# EAGLE board thtV1.1 (EAGLE 7.4.0)
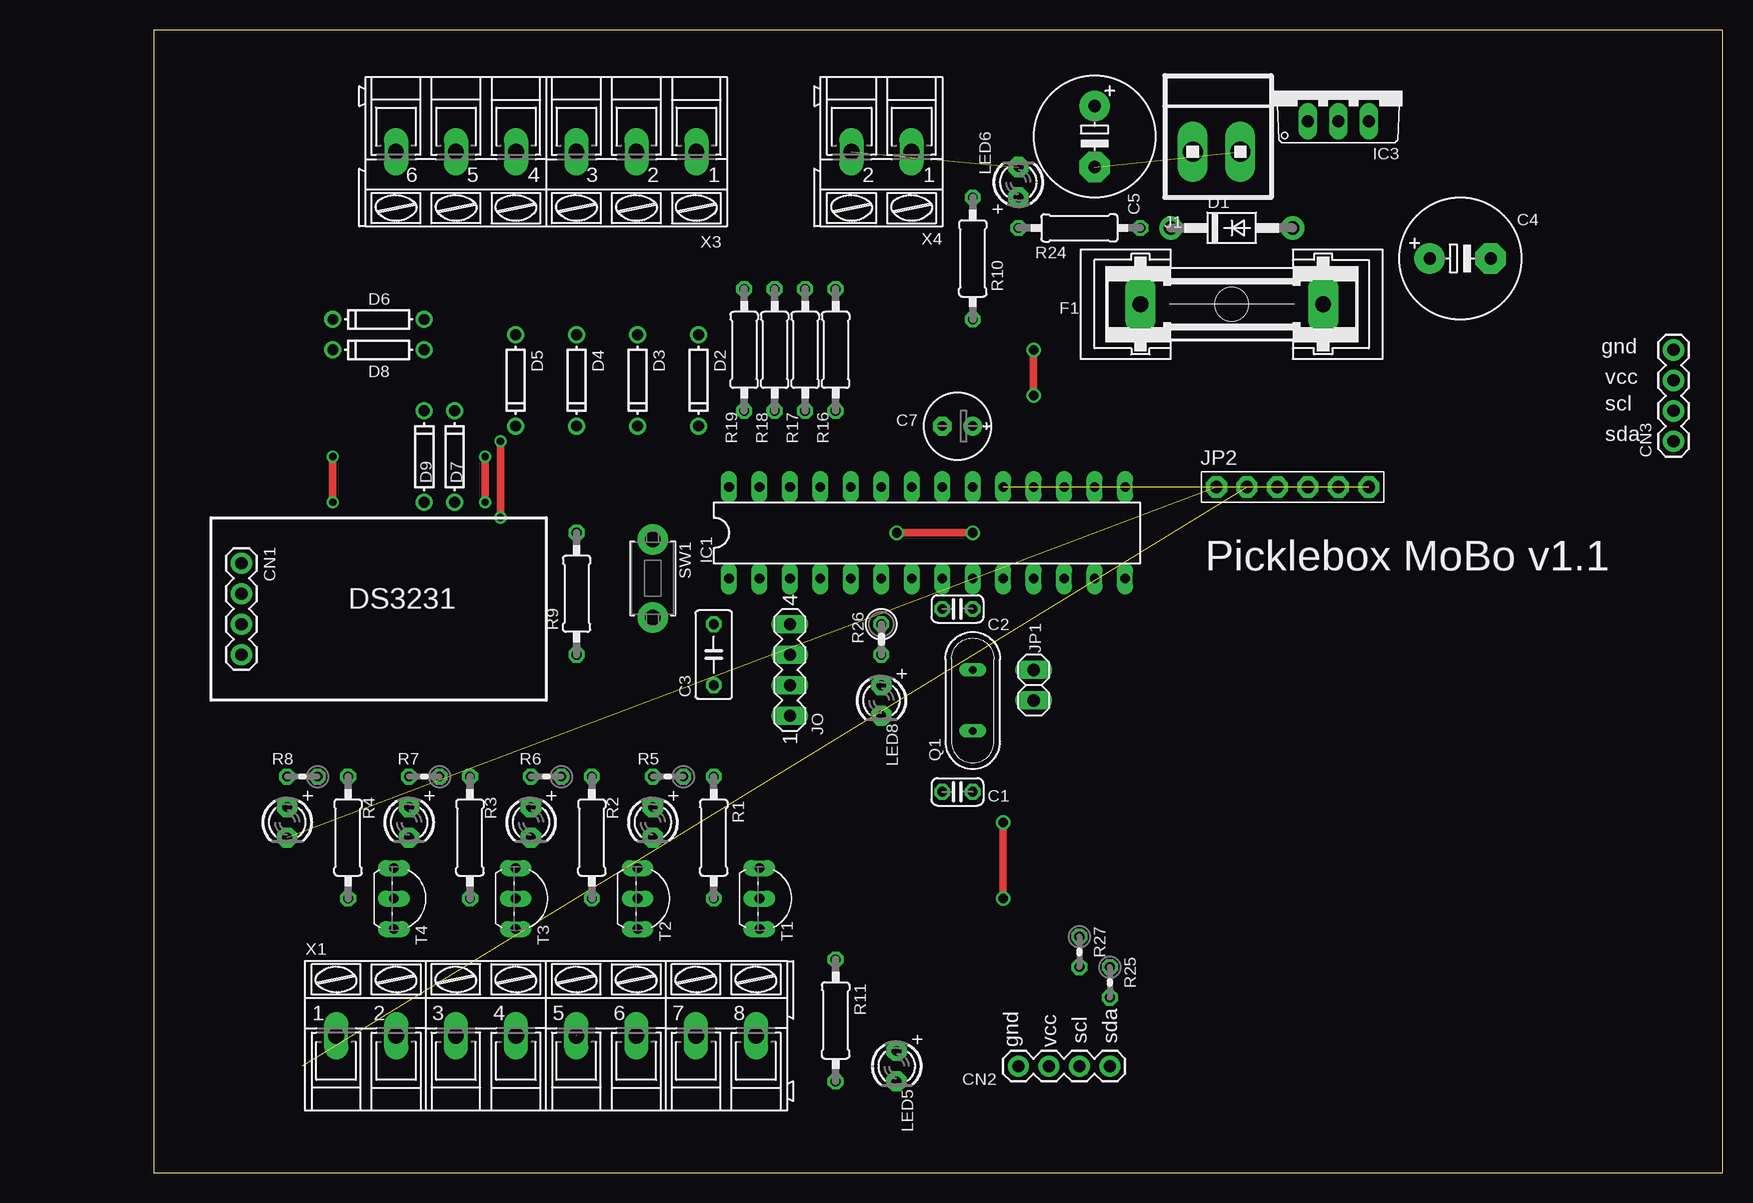
[diagram p0: board, top side]
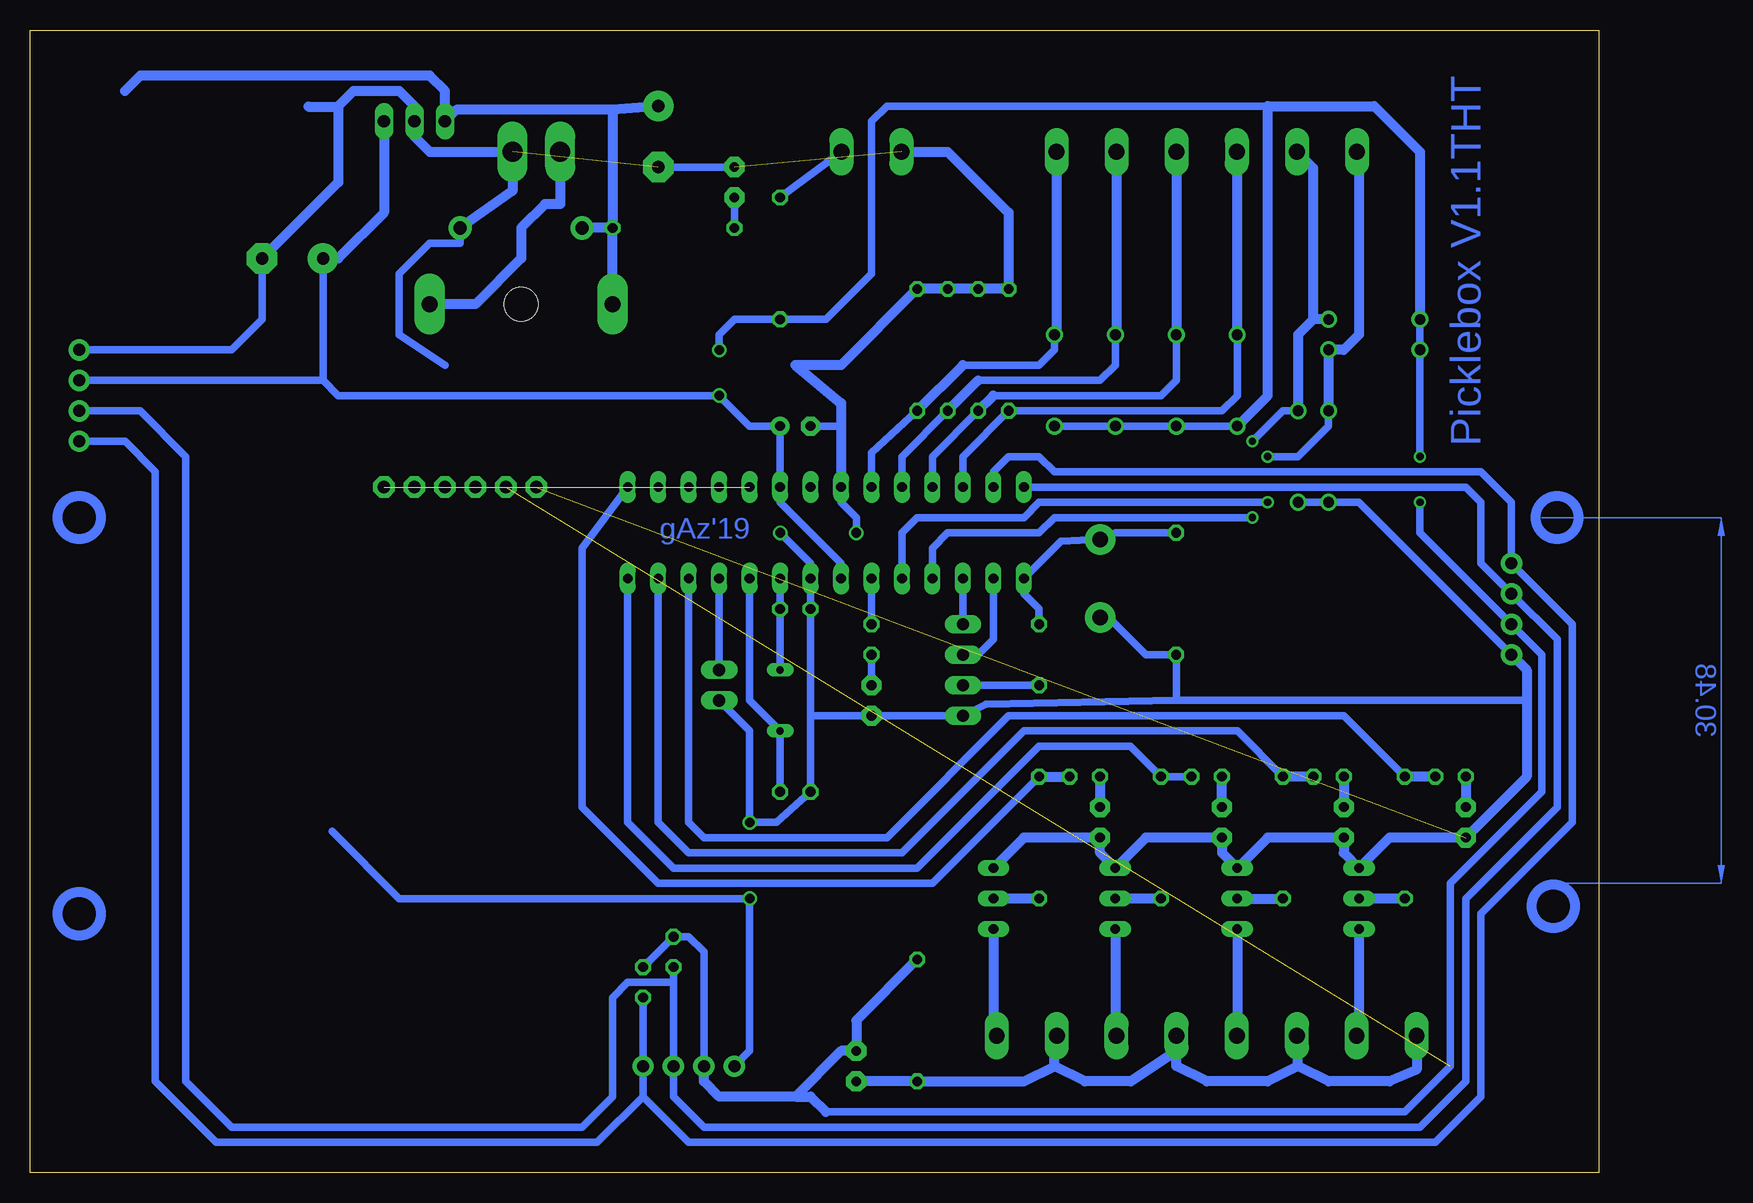
[diagram p1: board, bottom side, seen from below]

Size 130.79 x 95.24 mm. Coordinates in mm from the lower left corner, seen from the top.
Outline: 0,0 130.79,0 130.79,95.24 0,95.24 0,0
Copper layers (1*16): Top 0.035mm / dielectric 1.5mm / Bottom 0.035mm
Design rules "default": minimum track width 10mil, minimum drill 24mil, track to track 8mil, track to pad 8mil, pad to pad 8mil, via to via 8mil, smd to smd 8mil, copper to edge 40mil, drill to drill 8mil, minimum pad ring 10mil, minimum via ring 8mil, stop-mask expansion 4mil, vias tented up to drill 0mil, thermal gap 10mil

## Footprints (pad centres in the part's own frame; a part is rotated, then mirrored left to right if it is on the bottom)
C025-024X044 = drill 0.813 octagon: 1 -1.27,0; 2 1.27,0
C050-030X075 = drill 0.813 octagon: 1 -2.54,0; 2 2.54,0
E5-10,5 = drill 1.016 pad 2.54: + -2.54,0 | drill 1.016 pad 2.54 octagon: - 2.54,0
E2,5-6E = drill 0.813 pad 1.575: + -1.27,0 | drill 0.813 pad 1.575 octagon: - 1.27,0
1X04-BIG = drill 1.016 pad 1.778: 1 0,0; 2 2.54,0; 3 5.08,0; 4 7.62,0
DO41-10 = drill 1.118 pad 1.93: A 5.08,0; C -5.08,0
DO-1N4148 = drill 0.9: A -3.81,0; C 3.81,0
GSH15 = drill 1.321 pad 2.54 long: 1 -7.62,0; 2 7.62,0 | hole 2.794: 0,0
DIL28-3 = drill 0.813 long: 1 -16.51,-3.81; 2 -13.97,-3.81; 3 -11.43,-3.81; 4 -8.89,-3.81; 5 -6.35,-3.81; 6 -3.81,-3.81; 7 -1.27,-3.81; 8 1.27,-3.81; 9 3.81,-3.81; 10 6.35,-3.81; 11 8.89,-3.81; 12 11.43,-3.81; 13 13.97,-3.81; 14 16.51,-3.81; 15 16.51,3.81; 16 13.97,3.81; 17 11.43,3.81; 18 8.89,3.81; 19 6.35,3.81; 20 3.81,3.81; 21 1.27,3.81; 22 -1.27,3.81; 23 -3.81,3.81; 24 -6.35,3.81; 25 -8.89,3.81; 26 -11.43,3.81; 27 -13.97,3.81; 28 -16.51,3.81
TO220V = drill 1.016 long: 1 -2.54,-2.54; 2 0,-2.54; 3 2.54,-2.54
1X2MTA = drill 1.676 long: 1 1.981,0; 2 -1.981,0
MA04-1 = drill 1.016 long: 1 -3.81,0; 2 -1.27,0; 3 1.27,0; 4 3.81,0
1X02 = drill 1.016 long: 1 -1.27,0; 2 1.27,0
1X06-BIG = drill 1.016 pad 1.778 octagon: 1 -6.35,0; 2 -3.81,0; 3 -1.27,0; 4 1.27,0; 5 3.81,0; 6 6.35,0
LED3MM = drill 0.813 pad 1.676 octagon: A -1.27,0; K 1.27,0
QS = drill 0.61 long: 1 -2.54,0; 2 2.54,0
0207/10 = drill 0.813 octagon: 1 -5.08,0; 2 5.08,0
0204V = drill 0.813 octagon: 1 -1.27,0; 2 1.27,0
0207/2V = drill 0.813 octagon: 1 -1.27,0; 2 1.27,0
TACT_PANA-EVQ = drill 1.3 pad 2.54: P$1 -3.25,0; P$2 3.25,0
TO92-EBC-OVAL = drill 0.813 long: B 0,-1.27; C 2.54,-1.27; E -2.54,-1.27
AK300/8 = drill 1.321 long: 1 -17.501,0; 2 -12.497,0; 3 -7.518,0; 4 -2.515,0; 5 2.515,0; 6 7.518,0; 7 12.497,0; 8 17.501,0
AK300/6 = drill 1.321 long: 1 -12.522,0; 2 -7.518,0; 3 -2.515,0; 4 2.515,0; 5 7.518,0; 6 12.522,0
AK300/2 = drill 1.321 long: 1 -2.515,0; 2 2.489,0

## Placement (x,y rotation side)
C1  18p  [C025-024X044]  66.99,31.75 180 top
C2  18p  [C025-024X044]  66.99,46.99 180 top
C3  0u1  [C050-030X075]  46.67,43.18 90 top
C4  4.7u  [E5-10,5]  108.9,76.2 0 top
C5  100u  [E5-10,5]  78.42,86.36 270 top
C7  47u  [E2,5-6E]  66.99,62.23 180 top
CN1  Ds3231(i2c)  [1X04-BIG]  7.3,50.8 270 top
CN2  I2C-GPO  [1X04-BIG]  79.69,8.89 180 top
CN3  I2C-APU  [1X04-BIG]  126.68,60.96 90 top
D1  1N4004  [DO41-10]  89.85,78.74 0 top
D2  [DO-1N4148]  45.4,66.04 270 top
D3  [DO-1N4148]  40.32,66.04 270 top
D4  [DO-1N4148]  35.24,66.04 270 top
D5  [DO-1N4148]  30.16,66.04 270 top
D6  [DO-1N4148]  18.73,71.12 180 top
D7  [DO-1N4148]  25.08,59.69 90 top
D8  [DO-1N4148]  18.73,68.58 180 top
D9  [DO-1N4148]  22.54,59.69 90 top
F1  F1A  [GSH15]  89.85,72.39 180 top
IC1  ATMEGA328  [DIL28-3]  64.45,53.34 0 top
IC3  7805TV  [TO220V]  98.74,90.17 0 top
J1  PowerIn  [1X2MTA]  88.58,85.09 0 top
JO  Serial(+rst)  [MA04-1]  53.02,41.91 90 top
JP1  Main Pushbutton  [1X02]  73.34,40.64 270 top
JP2  SD_module  [1X06-BIG]  94.93,57.15 0 top
LED1  Out1  [LED3MM]  41.59,29.21 270 top
LED2  Out2  [LED3MM]  31.43,29.21 270 top
LED3  Out3  [LED3MM]  21.27,29.21 270 top
LED4  Out4  [LED3MM]  11.11,29.21 270 top
LED5  GPO-clip  [LED3MM]  61.91,8.89 270 top
LED6  pwr_ok  [LED3MM]  72.07,82.55 90 top
LED8  Err  [LED3MM]  60.64,39.37 270 top
Q1  16M  [QS]  68.26,39.37 90 top
R1  1k  [0207/10]  46.67,27.94 270 top
R2  1k  [0207/10]  36.51,27.94 270 top
R3  1k  [0207/10]  26.35,27.94 270 top
R4  1k  [0207/10]  16.19,27.94 270 top
R5  470  [0204V]  42.86,33.02 180 top
R6  470  [0204V]  32.7,33.02 180 top
R7  470  [0204V]  22.54,33.02 180 top
R8  470  [0204V]  12.38,33.02 180 top
R9  100k  [0207/10]  35.24,48.26 90 top
R10  0R1  [0207/10]  68.26,76.2 270 top
R11  4R7  [0207/10]  56.83,12.7 270 top
R16  1M  [0207/10]  56.83,68.58 90 top
R17  1M  [0207/10]  54.29,68.58 90 top
R18  1M  [0207/10]  51.75,68.58 90 top
R19  1M  [0207/10]  49.21,68.58 90 top
R24  470  [0207/10]  77.15,78.74 180 top
R25  10k  [0204V]  79.69,15.88 270 top
R26  330  [0207/2V]  60.64,44.45 270 top
R27  10k  [0204V]  77.15,18.41 270 top
SW1  Rst  [TACT_PANA-EVQ]  41.59,49.53 270 top
T1  2N2222  [TO92-EBC-OVAL]  51.75,22.86 270 top
T2  2N2222  [TO92-EBC-OVAL]  41.59,22.86 270 top
T3  2N2222  [TO92-EBC-OVAL]  31.43,22.86 270 top
T4  2N2222  [TO92-EBC-OVAL]  21.27,22.86 270 top
X1  GPO  [AK300/8]  32.7,11.43 0 top
X3  GPI  [AK300/6]  32.7,85.09 180 top
X4  Analog_Pwr  [AK300/2]  60.64,85.09 180 top

## Library data of the parts
C1-C3 = resistor
C4 C5 C7 R1-R11 R16-R19 R24-R27 = rcl
CN1-CN3 D1-D9 IC1 JP2 LED1-LED6 LED8 SW1 T1-T4 = adafruit
F1 = fuse; MPN: 64900001039; OC_FARNELL: 1271673; OC_NEWARK: 02P0318
IC3 = linear
J1 = con-amp
JO = con-lstb; OC_FARNELL: unknown; OC_NEWARK: unknown
JP1 = pinhead
Q1 = special
X1 X3 X4 = con-ptr500; OC_FARNELL: unknown; OC_NEWARK: unknown

## Nets
+5V: C4.+ C7.+ CN1.3 CN2.3 CN3.3 D2.C D3.C D4.C D5.C D6.C D8.C IC1.7 IC1.20 IC3.3 JP2.2 LED5.A R10.2 R11.1 R25.1 R27.1
GND: C1.2 C2.2 C4.- C5.- C7.- CN1.4 CN2.4 CN3.4 D1.A D7.A D9.A IC1.8 IC1.22 IC3.2 J1.1 JO.1 JP1.2 JP2.1 LED1.K LED2.K LED3.K LED4.K LED6.K LED8.K R9.1 R16.2 R17.2 R18.2 R19.2 SW1.P$2 T1.E T2.E T3.E T4.E X4.2
I2C_SCL: CN1.2 CN2.2 CN3.2 IC1.28 R27.2
I2C_SDA: CN1.1 CN2.1 CN3.1 IC1.27 R25.2
N$1: C2.1 IC1.9 Q1.2
N$2: C1.1 IC1.10 Q1.1
N$3: R4.2 T4.B
N$4: R3.2 T3.B
N$5: LED8.A R26.2
N$6: LED3.A R7.2
N$7: LED2.A R6.2
N$8: LED1.A R5.2
N$9: LED4.A R8.2
N$10: R1.2 T1.B
N$11: R2.2 T2.B
N$12: IC1.12 R4.1 R8.1
N$13: R10.1 X4.1
N$14: IC1.13 R3.1 R7.1
N$15: IC1.14 R2.1 R6.1
N$16: D3.A IC1.24 R17.1 X3.2
N$17: IC1.11 JP1.1
N$18: T3.C X1.4
N$19: D6.A D7.C IC1.4 X3.5
N$20: IC1.6 R26.1
N$21: C3.1 JO.2
N$22: IC1.18 JP2.3
N$23: IC1.19 JP2.5
N$24: IC1.2 JO.3
N$25: IC1.3 JO.4
N$26: IC1.17 JP2.4
N$27: F1.1 J1.2
N$29: C5.+ D1.C F1.2 IC3.1 R24.1
N$30: C3.2 IC1.1 R9.2 SW1.P$1
N$31: D8.A D9.C IC1.5 X3.6
N$32: IC1.16 JP2.6
N$34: T1.C X1.8
N$35: T2.C X1.6
N$37: T4.C X1.2
N$38: LED5.K R11.2 X1.1 X1.3 X1.5 X1.7
N$42: D5.A IC1.26 R19.1 X3.4
N$43: D2.A IC1.23 R16.1 X3.1
N$50: D4.A IC1.25 R18.1 X3.3
N$52: LED6.A R24.2
N$57: IC1.15 R1.1 R5.1

## Tracks (layer width: path | path; a pad name or v marks a point on that pad's centre or on a via)
+5V  (via drill 0.6, 0.8)  (1 unrouted)
  Top 0.61: v14.92,59.69 v14.92,55.88 | v73.34,68.58 v73.34,64.77
  Bottom 0.61: IC1.7 63.18,50.8 68.26,55.88 IC1.20 C7.+ 70.8,62.23 v73.34,64.77 105.09,64.77 106.36,66.04 | D6.C D8.C v14.92,59.69 | 27.62,88.9 59.37,88.9 60.64,87.63 60.64,74.93 64.45,71.12 R10.2 72.07,71.12 73.34,69.85 v73.34,68.58 | R25.1 R27.1 75.88,19.68 74.61,18.41 CN2.3 | D5.C D4.C D3.C D2.C | 106.36,66.04 C4.+ | 106.36,66.04 CN3.3 | v14.92,55.88 14.92,53.34 CN1.3 4.76,43.18 4.76,31.75 12.38,24.13 12.38,8.89 16.19,5.08 64.45,5.08
  Bottom 0.813: D6.C 14.92,85.09 18.73,88.9 27.62,88.9 27.62,64.77 D5.C | IC3.3 101.28,80.01 105.09,76.2 C4.+ | 66.99,6.35 73.34,6.35 74.61,7.62 CN2.3 | R11.1 61.91,12.7 LED5.A 63.18,10.16 66.99,6.35 | 66.99,6.35 65.72,6.35 64.45,5.08
GND  (via drill 0.6, 0.8)  (3 unrouted)
  Top 0.61: v68.26,53.34 v61.91,53.34 | v70.8,29.21 v70.8,22.86
  Bottom 0.61: 65.72,38.1 C2.2 IC1.8 65.72,50.8 v68.26,53.34 | 65.72,38.1 C1.2 68.58,29.21 v70.8,29.21 70.8,36.83 JP1.2 | 65.72,38.1 LED8.K JO.1 51.12,39.05 35.24,39.37 | v61.91,53.34 61.91,54.61 63.18,55.88 IC1.22 | 35.24,39.37 R9.1 37.78,43.18 40.88,46.28 SW1.P$2 | 6.03,39.37 35.24,39.37 | CN2.4 70.8,10.16 v70.8,22.86 100.01,22.86 105.61,28.46 | D7.A D9.A 20,55.88 CN1.4 | LED6.K C5.- | C7.- 63.18,62.23 | CN3.4 113.98,68.58 111.44,71.12 C4.- | 96.2,67.31 100.01,69.85 100.01,74.93 97.47,77.47 94.93,77.47 D1.A
  Bottom 0.813: T1.E 47.94,27.94 LED1.K 41.59,26.67 T2.E 37.78,27.94 LED2.K 31.43,26.67 T3.E 27.62,27.94 LED3.K 21.27,26.67 T4.E 17.46,27.94 LED4.K 6.03,33.02 6.03,39.37 6.03,41.91 CN1.4 | IC1.22 63.18,62.23 63.18,64.14 66.99,67.31 63.18,67.31 R16.2 R17.2 R18.2 R19.2 49.21,80.01 54.29,85.09 X4.2 | D1.A 90.56,81.84 J1.1 97.47,85.09 98.74,86.36 IC3.2 98.74,88.9 100.01,90.17 103.82,90.17 105.09,88.9 | 105.09,88.9 107.59,88.86 105.13,88.86 105.09,88.9 | 105.09,88.9 105.09,82.55 C4.-
I2C_SCL
  Bottom 0.61: IC1.28 11.11,57.15 9.84,55.88 9.84,50.8 CN1.2 3.49,44.45 3.49,30.48 11.11,22.86 11.11,7.62 14.92,3.81 74.61,3.81 77.15,6.35 CN2.2 77.15,15.88 | CN3.2 121.6,63.5 117.79,59.69 117.79,7.62 113.98,3.81 84.77,3.81 82.23,6.35 82.23,14.61 80.96,15.88 77.15,15.88 | 77.15,15.88 R27.2
I2C_SDA
  Bottom 0.61: 79.69,6.35 75.88,2.54 13.65,2.54 9.84,6.35 9.84,21.59 2.22,29.21 2.22,45.72 CN1.1 7.3,55.88 9.84,58.42 45.4,58.42 46.67,59.69 49.21,59.69 50.48,58.42 IC1.27 | R25.2 CN2.1 79.69,6.35 | 79.69,6.35 83.5,2.54 115.25,2.54 120.33,7.62 120.33,58.42 122.87,60.96 CN3.1
N$1
  Bottom 0.61: Q1.2 C2.1 IC1.9
N$2
  Bottom 0.61: IC1.10 70.8,39.37 Q1.1 C1.1
N$3
  Bottom 0.813: R4.2 T4.B
N$4
  Bottom 0.813: T3.B R3.2
N$5
  Bottom 0.61: R26.2 LED8.A
N$6
  Bottom 0.813: R7.2 LED3.A
N$7
  Bottom 0.813: LED2.A R6.2
N$8
  Bottom 0.813: R5.2 LED1.A
N$9
  Bottom 0.813: R8.2 LED4.A
N$10
  Bottom 0.813: R1.2 T1.B
N$11
  Bottom 0.813: R2.2 T2.B
N$12
  Bottom 0.61: IC1.12 75.88,29.21 74.61,27.94 59.37,27.94 49.21,38.1 21.27,38.1 R4.1
  Bottom 0.813: R8.1 R4.1
N$13
  Bottom 0.61: X4.1 R10.1
N$14
  Bottom 0.61: R3.1 30.16,36.83 47.94,36.83 58.1,26.67 75.88,26.67 78.42,29.21 IC1.13
  Bottom 0.813: R7.1 R3.1
N$15
  Bottom 0.61: IC1.14 80.96,29.21 77.15,25.4 56.83,25.4 46.67,35.56 39.05,35.56 R2.1 R6.1
N$16
  Bottom 0.61: D3.A 40.32,67.31 41.59,66.04 51.75,66.04 | R17.1 58.1,59.69 IC1.24
  Bottom 0.813: X3.2 40.22,69.95 D3.A | R17.1 51.75,66.04
N$17
  Bottom 0.61: IC1.11 JP1.1
N$18
  Bottom 0.813: T3.C 30.16,11.46 X1.4
N$19  (via drill 0.6)
  Top 0.61: v28.89,60.96 v28.89,54.61
  Bottom 0.61: IC1.4 55.56,52.07 54.29,53.34 46.67,53.34 45.4,54.61 v28.89,54.61 | D7.C 26.35,63.5 v28.89,60.96
  Bottom 0.813: D6.A 23.81,71.12 | 23.81,71.12 25.08,69.85 D7.C 25.08,64.77 | 23.81,71.12 23.81,83.72 X3.5
N$20
  Bottom 0.61: R26.1 IC1.6
N$21
  Bottom 0.61: C3.1 JO.2
N$22  (1 unrouted)
N$23  (1 unrouted)
N$24
  Bottom 0.61: IC1.2 50.48,44.45 51.75,43.18 JO.3
N$25
  Bottom 0.61: IC1.3 JO.4
N$26  (1 unrouted)
N$27
  Bottom 0.813: J1.2 86.6,80.72 87.87,80.72 89.85,78.74 89.85,76.2 93.66,72.39 F1.1
N$29
  Bottom 0.813: 82.23,88.58 95.25,88.58 IC3.1 96.2,90.17 97.47,91.44 121.6,91.44 122.87,90.17 | F1.2 R24.1 | C5.+ 82.23,88.58 | 82.23,88.58 R24.1 | R24.1 D1.C
N$30
  Bottom 0.61: C3.2 46.67,46.99 47.94,48.26 IC1.1 44.84,52.63 SW1.P$1 40.32,53.34 R9.2
N$31  (via drill 0.6)
  Top 0.61: v27.62,55.88 v27.62,59.69
  Bottom 0.61: IC1.5 58.1,53.34 56.83,54.61 47.94,54.61 46.67,55.88 v27.62,55.88 | v27.62,59.69 25.08,59.69 22.54,62.23 D9.C
  Bottom 0.813: X3.6 20,84.91 20,69.85 21.27,68.58 D8.A D9.C
N$32  (1 unrouted)
N$34
  Bottom 0.813: T1.C 50.48,11.43 X1.8
N$35
  Bottom 0.813: T2.C 40.32,11.53 X1.6
N$37
  Bottom 0.813: T4.C 20,11.63 X1.2
N$38  (1 unrouted)
  Bottom 0.813: X1.1 15.2,8.61 17.46,7.62 22.54,7.62 25.08,8.89 | 25.08,8.89 25.08,11.33 | 25.08,11.33 X1.3 25.08,11.43 25.08,11.33 | 25.08,8.89 27.62,7.62 32.7,7.62 35.24,8.89 35.24,10.16 | 35.24,11.43 35.24,10.16 | 35.24,10.16 39.05,7.62 42.86,7.62 45.4,8.89 | 45.4,8.89 45.4,11.23 X1.7 | 45.4,8.89 47.94,7.62 R11.2 LED5.K
N$42
  Bottom 0.61: D5.A 30.16,64.77 31.43,63.5 R19.1 53.02,59.69 IC1.26
  Bottom 0.813: D5.A 30.16,85.06 X3.4
N$43
  Bottom 0.61: IC1.23 60.64,60.01 R16.1 | 53.02,67.31 46.67,67.31 45.4,68.58 D2.A
  Bottom 0.813: X3.1 45.22,70.03 D2.A | R16.1 53.02,67.31
N$47  (via drill 0.8)
  other vias: 68.26,53.34
N$50
  Bottom 0.61: D4.A 35.24,66.04 36.51,64.77 50.48,64.77 | R18.1 55.56,59.69 IC1.25
  Bottom 0.813: X3.3 35.22,69.88 D4.A | R18.1 50.48,64.77
N$52
  Bottom 0.61: LED6.A R24.2
N$57
  Bottom 0.61: R1.1 55.56,24.13 78.42,24.13 84.77,30.48 84.77,52.07 IC1.15
  Bottom 0.813: R1.1 R5.1
(copper drawn outside any net)
  shapes: Bottom area x1, Bottom circle x4

## Text on the board
Bottom: Picklebox V1.1THT | gAz'19
tPlace: DS3231
tNames: gnd | vcc | scl | sda | Picklebox MoBo v1.1 | scl | sda | gnd | vcc